# Altium PCB Для Сережи(autoroute.PcbDoc (part 2 of 2)
Units mm, origin at the board's own origin, x right, y up, seen from the top; angles counter-clockwise.
Board outline 53 x 45 mm, 4 copper layers (Top Layer, Layer 1, Layer 2, Bottom Layer), stack 1.083 mm thick; 122 components, 141 nets, 830 pads, 246 vias.
Unrouted connection lines stored in the file: 174.
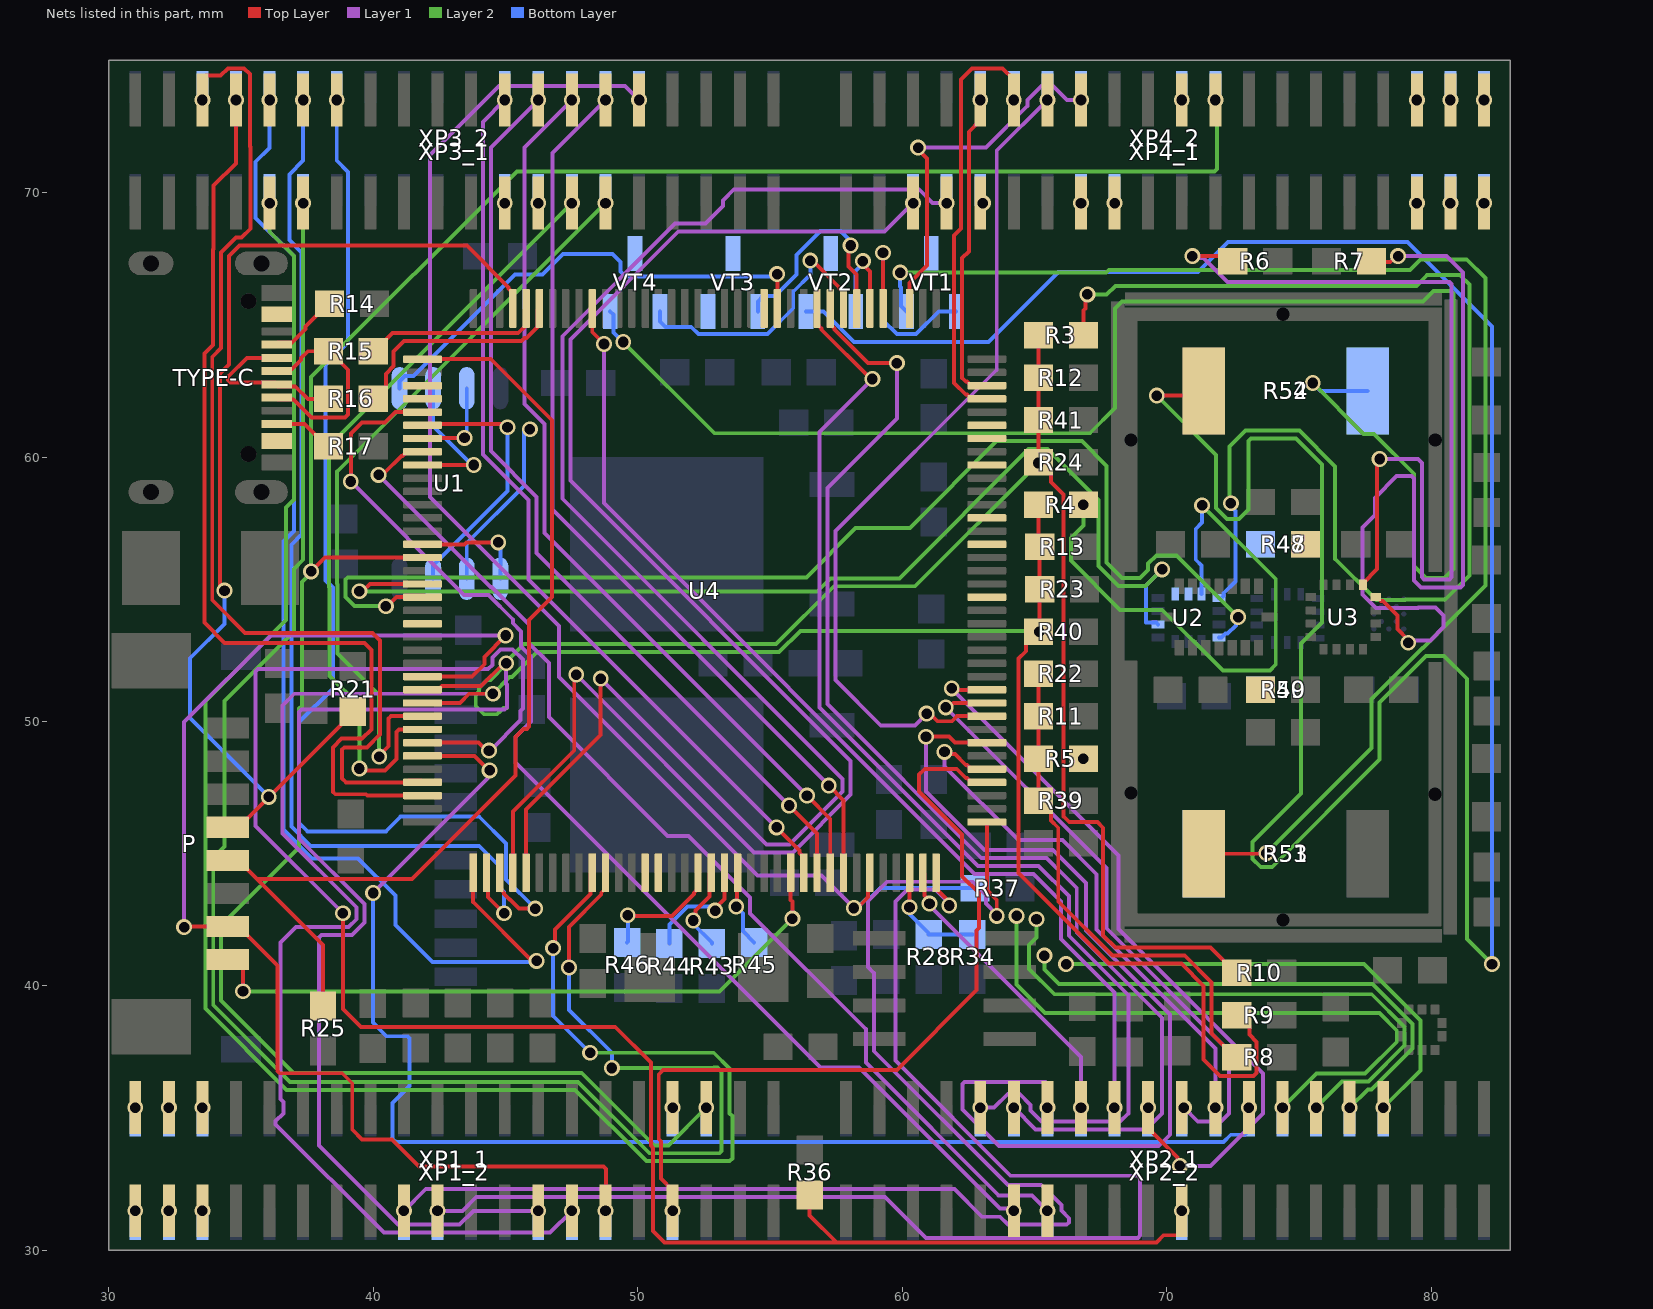
[diagram p4: the nets of this part, all layers, seen from the top]

## Via types
v1: diameter 0.6, hole 0.4, Top Layer to Bottom Layer, 246 vias

## Nets (pads, with @x,y where several pads share a name; then routed paths per layer and width w, separated by ;. In a path a pad name is that pad's centre, name@x,y a point inside that pad or via, vN(x,y) a via of type N, cw(c..) or ccw(c..) an arc to the next point about the centre after c; other vN are vias at no path point) (continued)
NetP_4: P.4 R21.1 U4.105 | length 41.7
  Top Layer w0.15: v1(34.375,54.95) 34.212,55.113 34.212,63.161 34.545,63.494 34.545,67.605 34.94,68 43.537,68 45.12,66.417 45.12,66.375 45.28,66.215 U4.105@45.28,65.62 ; P.4@34.5,46 34.9,46 38.925,50.025 39.175,50.025 39.6,50.45 R21.1@39.6,50.5
  Bottom Layer w0.15: v1(34.375,54.95) 34.375,53.693 33.075,52.393 33.075,50.125 v1(36.05,47.15)
NetP_5: P.5 R25.1 U4.109 | length 38.5
  Top Layer w0.15: P.5@34.5,44.75 34.9,44.75 35.6,44.05 ; R25.1@38.1,39.25 38.1,41.55 35.6,44.05 ; U4.109@41.86,63.7 44.442,63.7 46.75,61.392 46.75,54.701 45.892,53.843 45.892,49.813 45.805,49.725 45.683,49.725 45.375,49.417 45.375,47.958 41.467,44.05 35.6,44.05
NetP_7: P.7 R5.2 R8.1 R11.1 R22.1 R39.1 U4.133 XP1_1.29 XP1_2.29 | length 69.2
  Top Layer w0.15: v1(32.85,42.225) 32.875,42.25 P.7@34.5,42.25 34.9,42.25 36.371,40.779 36.371,36.788 36.459,36.7 38.828,36.7 39.205,36.323 39.205,34.577 39.582,34.2 40.7,34.2 41.725,33.175 48.712,33.175 48.8,33.087 48.8,31.52 v1(48.78,31.5) ; U4.133@41.86,51.7 43.733,51.7 44.198,52.166 44.198,52.447 v1(45.005,53.253) ; R22.1@65.15,51.8 R11.1@65.15,50.2 R5.2@65.15,48.6 R39.1@65.15,47 65.2,47 65.625,46.575 65.625,46.258 65.9,45.983 65.9,43.193 67.945,41.148 70.683,41.148 71.7,40.131 71.7,38.2 72.6,37.3 R8.1@72.65,37.3
  Layer 1 w0.15: v1(32.85,42.225) 32.85,49.975 36.128,53.253 v1(45.005,53.253)
NetP_8: P.8 U4.25 | length 25.3
  Top Layer w0.15: P.8@34.5,41 34.75,41 35.075,40.675 v1(35.075,39.8) ; U4.25@55.78,44.28 55.78,43.256 55.85,43.186 v1(55.85,42.55)
  Layer 2 w0.15: v1(35.075,39.8) 53.1,39.8 v1(55.85,42.55)
NetR3_1: R3.1 U2.1 | length 48.1
  Top Layer w0.15: R3.1@66.85,64.6 66.85,65.55 66.925,65.625 66.925,66.075 v1(67,66.15)
  Layer 2 w0.15: v1(67,66.15) 67.733,66.15 68.058,66.475 79.441,66.475 79.841,66.875 81.099,66.875 81.45,66.524 81.45,55.525 80.533,54.608 79.035,54.608 79.013,54.586 77.939,54.586 77.85,54.675 76.371,56.154 76.371,59.645 75.017,61 72.976,61 72.375,60.399 72.375,58.303 v1(72.427,58.252)
  Bottom Layer w0.15: U2.1@71.975,54.675 72.075,54.675 72.15,54.75 72.15,54.85 72.6,55.3 72.6,57.956 72.427,58.13 v1(72.427,58.252)
NetR3_2: R3.2 R10.1 R12.2 R24.2 R41.1 U4.134 XP1_1.25 XP1_2.25 | length 98.6
  Top Layer w0.15: U4.134@41.86,51.2 42.455,51.2 42.605,51.35 44.082,51.35 44.935,52.203 v1(45.028,52.203) ; R3.2@65.15,64.6 R12.2@65.15,63 R41.1@65.15,61.4 R24.2@65.15,59.8 65.2,59.8 65.625,59.375 65.625,59.058 66.1,58.583 66.1,46.417 66.317,46.2 67.383,46.2 67.6,45.983 67.6,41.917 68.069,41.448 71.652,41.448 72.6,40.5 R10.1@72.65,40.5
  Layer 1 w0.15: v1(45.028,52.203) 45.028,51.425 45.049,51.403 45.049,50.538 44.961,50.45 37.288,50.45 37.2,50.362 37.2,45.567 39.675,43.092 39.675,42.408 39.192,41.925 38.038,41.925 37.95,41.837 37.95,33.968 40.943,30.975 43.268,30.975 43.793,31.5 v1(46.24,31.5)
  Layer 2 w0.15: v1(45.028,52.203) 45.028,52.17 v1@45.025,52.167 ; 45.05,50.515 44.928,50.515 44.773,50.36 44.763,50.36 44.678,50.275 44.183,50.275 43.875,50.583 43.875,51.017 43.999,51.142 43.999,51.267 44.307,51.575 44.433,51.575 v1@45.025,52.167 ; v1(65.15,59.775) 60.49,55.115 57.414,55.115 55.224,52.925 45.7,52.925 45.025,52.25 v1@45.025,52.167
NetR4_1: R4.1 U2.14 | length 22.6
  Layer 2 w0.15: v1(66.85,58.2) 66.85,57.409 66.375,56.934 66.375,56.084 68.234,54.225 69.833,54.225 72.133,51.925 73.9,51.925 74.125,52.15 74.125,55.386 v1(71.34,58.171)
  Bottom Layer w0.15: U2.14@71.325,54.825 71.325,55.892 71.1,56.117 71.1,57.283 71.34,57.523 v1(71.34,58.171)
NetR4_2: R4.2 R9.1 R13.1 R23.1 R40.1 U4.135 XP1_1.27 XP1_2.27 | length 96
  Top Layer w0.15: U4.135@41.86,50.7 43.274,50.7 43.624,51.05 v1(44.524,51.05) ; R4.2@65.15,58.2 65.15,56.65 R13.1@65.2,56.6 R23.1@65.2,55 65.2,53.45 R40.1@65.15,53.4 65.1,53.4 64.675,52.975 64.675,52.658 64.4,52.383 64.4,44.269 67.821,40.848 70.559,40.848 71.4,40.007 71.4,37.217 72.017,36.6 73.283,36.6 73.4,36.717 73.4,37.883 73.125,38.158 73.125,38.475 72.7,38.9 R9.1@72.65,38.9
  Layer 1 w0.15: v1(44.524,51.05) 37.013,51.05 36.575,50.612 36.575,45.767 39.375,42.967 39.375,42.533 39.067,42.225 37.075,42.225 36.5,41.65 36.5,35.722 36.605,35.617 36.605,35.183 36.311,34.888 36.311,34.764 40.4,30.675 46.685,30.675 v1(47.51,31.5)
  Layer 2 w0.15: v1(44.524,51.05) 45.153,51.678 45.245,51.678 46.192,52.625 55.348,52.625 56.148,53.425 65.15,53.425 v1(65.175,53.4)
NetR5_1: R5.1 U2.13
  other v1: 66.85,48.6
NetR6_1: R6.1 U3.16 U4.10 XP3_1.9 XP3_2.9 | length 106.7
  Top Layer w0.15: v1(46.798,41.433) 46.877,41.513 46.877,42.134 48.215,43.472 48.215,44.215 U4.10@48.28,44.28 ; v1(70.975,67.6) 72.3,67.6 R6.1@72.5,67.4 ; U3.16@77.425,55.175 77.425,55.225 77.959,55.759 77.959,59.834 v1(78.05,59.925)
  Layer 1 w0.15: v1(70.975,67.6) 71.05,67.525 71.4,67.525 72.3,66.625 80.687,66.625 80.775,66.537 80.775,55.463 80.687,55.375 79.736,55.375 79.649,55.463 79.649,59.776 79.5,59.925 v1(78.05,59.925)
  Layer 2 w0.15: v1(36.08,69.6) 36.08,68.52 36.995,67.605 36.995,58.395 36.7,58.1 36.7,53.833 33.65,50.783 33.65,39.151 36.726,36.075 47.625,36.075 50.325,33.375 53.475,33.375 53.575,33.475 53.575,35.083 53.475,35.183 53.475,36.874 52.874,37.475 v1(48.2,37.475)
  Bottom Layer w0.15: v1@46.8,41.45 46.8,38.875 v1(48.2,37.475)
NetR7_1: R7.1 U3.1 U4.11 XP3_1.11 XP3_2.11 | length 104.1
  Top Layer w0.15: v1(47.4,40.7) 47.4,42.233 48.62,43.453 48.62,43.525 48.78,43.685 U4.11@48.78,44.28 ; R7.1@77.75,67.4 77.775,67.375 78.454,67.375 78.679,67.6 v1(78.75,67.6) ; U3.1@77.9,54.7 77.95,54.7 78.1,54.55 78.183,54.55 78.729,54.004 78.729,53.496 79.133,53.092 v1(79.133,52.976)
  Layer 1 w0.15: v1(78.75,67.6) 80.575,67.6 81.2,66.975 81.2,55.163 81.112,55.075 79.612,55.075 79.349,55.339 79.349,59.187 79.261,59.275 78.694,59.275 77.871,58.452 77.871,57.804 77.4,57.333 77.4,54.8 77.914,54.286 79.499,54.286 79.52,54.308 80.167,54.308 80.475,54 80.475,53.566 79.968,53.059 79.216,53.059 v1(79.133,52.976)
  Layer 2 w0.15: v1(37.35,69.6) 37.35,56.117 37,55.767 37,53.4 34.375,50.775 34.375,45.267 33.95,44.842 33.95,39.275 36.85,36.375 47.749,36.375 50.449,33.675 53.087,33.675 53.175,33.763 53.175,36.75 53.012,36.913 52.888,36.913 52.875,36.9 v1(49.025,36.9)
  Bottom Layer w0.15: v1(47.4,40.7) 47.4,39.1 49.025,37.475 v1(49.025,36.9)
NetR14_2: R14.2 TYPE-C.A5 | length 2.7
  Top Layer w0.15: TYPE-C.A5@36.35,64.25 36.425,64.325 36.928,64.325 37.439,64.836 37.439,64.939 38.3,65.8 R14.2@38.35,65.8
NetR15_1: R15.1 TYPE-C.A6 TYPE-C.B6 | length 8.1
  Top Layer w0.15: TYPE-C.B6@36.35,62.25 36.425,62.175 36.992,62.175 37.667,61.5 38.933,61.5 39.05,61.617 39.05,63.3 38.35,64 R15.1@38.3,64 37.525,64 37.264,63.739 37.264,63.661 36.928,63.325 36.425,63.325 TYPE-C.A6@36.35,63.25
NetR15_2: R15.2 U4.104 | length 6.8
  Top Layer w0.15: R15.2@40,64 40.05,64 40.735,64.685 45.482,64.685 45.715,64.918 45.715,65.555 U4.104@45.78,65.62
NetR16_1: R16.1 TYPE-C.A7 TYPE-C.B7 | length 6.3
  Top Layer w0.15: TYPE-C.B7@36.35,63.75 35.225,63.75 34.512,63.037 34.512,62.913 34.6,62.825 36.275,62.825 TYPE-C.A7@36.35,62.75 36.425,62.675 37.05,62.675 37.525,62.2 R16.1@38.3,62.2
NetR16_2: R16.2 U4.103 | length 8.7
  Top Layer w0.15: R16.2@40,62.2 40.05,62.2 40.475,62.625 40.475,63.142 40.769,63.436 40.769,63.994 41.16,64.385 45.607,64.385 45.722,64.5 45.797,64.5 46.215,64.918 46.215,65.555 U4.103@46.28,65.62
NetR17_1: R17.1 TYPE-C.B5 | length 2.3
  Top Layer w0.15: TYPE-C.B5@36.35,61.25 37.4,61.25 38.25,60.4 R17.1@38.3,60.4
NetR28_1: R28.1 R34.2 U4.34 | length 4.3
  Top Layer w0.15: v1(60.275,42.975) 60.277,42.977 60.277,44.278 U4.34@60.28,44.28
  Bottom Layer w0.15: v1(60.275,42.975) 60.275,42.725 61,42 R28.1@61,41.95 62.646,41.95 R34.2@62.65,41.953
NetR36_1: R36.1 U4.138 XP2_1.20 XP2_2.20 | length 73.8
  Top Layer w0.15: v1(38.85,42.75) 38.85,39.131 39.531,38.45 49.15,38.45 50.495,37.105 50.495,33.961 50.575,33.881 50.575,30.737 51.012,30.3 57.525,30.3 ; U4.138@41.86,49.2 43.983,49.2 44.283,48.9 v1(44.375,48.9) ; R36.1@56.5,32.1 56.5,31.325 57.525,30.3 ; v1(70.57,31.5) 70.57,30.725 70.42,30.575 69.883,30.575 69.608,30.3 57.525,30.3
  Layer 1 w0.15: v1(38.85,42.75) 35.555,46.045 35.555,51.892 35.642,51.98 44.338,51.98 44.503,52.144 44.503,52.421 44.81,52.728 45.273,52.728 45.663,52.339 45.663,50.484 45.575,50.396 45.575,50.05 44.425,48.9 v1(44.375,48.9)
NetR37_1: R37.1 U4.31 XP3_1.32 XP3_2.32 | length 52.3
  Top Layer w0.15: v1(58.175,42.95) 58.297,42.95 58.551,43.204 58.557,43.204 58.715,43.362 58.715,44.215 U4.31@58.78,44.28
  Layer 1 w0.15: v1(50.05,73.5) 49.525,74.025 44.753,74.025 42.15,71.422 42.15,58.484 47.029,53.605 47.029,51.679 54.533,44.175 56.95,44.175 v1(58.175,42.95)
  Bottom Layer w0.15: v1(58.175,42.95) 58.297,42.95 58.596,43.249 58.724,43.249 59.175,43.7 R37.1@62.75,43.7
NetR43_1: R43.1 R48.1 U4.19 | length 3.2
  Top Layer w0.15: v1(52.1,42.475) 52.186,42.561 52.186,42.854 52.715,43.382 52.715,44.215 U4.19@52.78,44.28
  Bottom Layer w0.15: v1@52.1,42.425 52.1,42.35 52.8,41.65 R43.1@52.8,41.6
NetR44_1: R44.1 R49.1 U4.20 | length 4.4
  Top Layer w0.15: v1(52.925,42.85) 52.925,42.942 53.273,43.291 53.273,44.273 U4.20@53.28,44.28
  Bottom Layer w0.15: R44.1@51.2,41.6 51.2,42.317 51.883,43 52.775,43 v1(52.925,42.85)
NetR45_1: R45.1 R50.1 U4.21 | length 2.9
  Top Layer w0.15: v1(53.725,43) 53.752,43.027 53.752,44.253 U4.21@53.78,44.28
  Bottom Layer w0.15: v1(53.725,43) 53.975,42.75 53.975,42.075 R45.1@54.4,41.65
NetR46_1: R46.1 R47.1 U4.18 | length 4.7
  Top Layer w0.15: v1@49.625,42.65 51.287,42.65 52.12,43.483 52.12,43.525 52.28,43.685 U4.18@52.28,44.28
  Bottom Layer w0.15: R46.1@49.6,41.65 49.625,41.675 v1(49.625,42.675)
NetR51_1: R51.1 VT1.2 | length 51.8
  Top Layer w0.15: R51.1@71.4,45 73.75,45 v1(73.775,45.025)
  Layer 2 w0.15: v1(59.925,66.975) 67.71,66.975 67.81,67.075 79.192,67.075 79.592,67.475 81.347,67.475 82.05,66.772 82.05,55.141 79.689,52.779 79.678,52.779 77.75,50.851 77.75,49 v1(73.775,45.025)
  Bottom Layer w0.15: v1(59.925,66.975) 59.925,66.446 59.956,66.415 59.956,65.712 VT1.2@60.16,65.508
NetR52_1: R52.1 VT2.2 | length 108.1
  Top Layer w0.15: v1(69.625,62.325) 71.225,62.325 R52.1@71.4,62.5
  Layer 2 w0.15: v1(69.625,62.325) 71.865,60.085 71.865,58.07 72.274,57.662 72.737,57.662 73.1,58.025 73.1,60.612 73.188,60.7 74.892,60.7 75.875,59.717 75.875,53.745 75.075,52.945 75.075,47.275 73.25,45.45 73.25,44.808 73.558,44.5 73.992,44.5 78.05,48.558 78.05,50.726 79.803,52.479 80.489,52.479 81.351,51.617 81.351,41.774 v1(82.3,40.825)
  Bottom Layer w0.15: VT2.2@56.36,65.508 57.017,65.508 58.178,64.347 63.255,64.347 65.908,67 71.192,67 72.317,68.125 79.108,68.125 82.3,64.933 v1(82.3,40.825)
NetR53_1: R53.1 VT3.2
NetR54_1: R54.1 VT4.2 | length 61.8
  Layer 2 w0.15: v1(49.45,64.35) 52.9,60.9 67.092,60.9 68.05,61.858 68.05,65.618 68.307,65.875 79.69,65.875 80.09,66.275 80.762,66.275 80.85,66.187 80.85,55.774 80.497,55.421 79.811,55.421 79.349,55.883 79.349,59.369 77.841,60.876 77.449,60.876 v1(75.525,62.8)
  Bottom Layer w0.15: VT4.2@48.96,65.508 49.083,65.385 49.083,64.717 v1(49.45,64.35) ; v1(75.525,62.8) 75.825,62.5 R54.1@77.6,62.5
NetTYPE-C_A4_B9: TYPE-C.A4_B9 TYPE-C.B4_A9
NetU1_1: U1.1 U4.123 | length 4.3
  Top Layer w0.15: U4.123@41.86,56.7 43.449,56.7 43.524,56.775 v1(44.725,56.775)
  Bottom Layer w0.15: v1(44.725,56.775) 44.805,56.695 U1.1@44.805,55.4
NetU1_2: U1.2 U4.86 | length 6.5
  Bottom Layer w0.15: U1.2@43.535,55.4 43.535,56.746 45.7,58.911 v1@45.7,61.05
  other v1: 45.925,61.05
NetU1_3: U1.3 U4.114 | length 10.2
  Top Layer w0.15: U4.114@41.86,61.2 41.91,61.25 44.828,61.25 44.953,61.125 v1(45.075,61.125)
  Bottom Layer w0.15: U1.3@42.265,55.4 42.265,55.9 45.075,58.71 v1(45.075,61.125)
NetU1_5: U1.5 U4.85 | length 18.4
  Top Layer w0.15: v1(55.273,66.919) 55.276,66.915 55.276,65.624 U4.85@55.28,65.62
  Bottom Layer w0.15: U1.5@40.995,62.6 40.995,62.854 41.203,63.062 41.52,63.062 45.358,66.9 46.408,66.9 47.183,67.675 49.042,67.675 49.35,67.367 49.35,67.02 49.538,66.832 55.185,66.832 v1(55.273,66.919)
NetU1_6: U1.6 U4.117 | length 5.5
  Top Layer w0.15: U4.117@41.86,59.7 v1(43.8,59.7)
  Bottom Layer w0.15: U1.6@42.265,62.6 42.265,61.168 43.733,59.7 v1(43.8,59.7)
NetU1_7: U1.7 U4.115 | length 3.5
  Top Layer w0.15: U4.115@41.86,60.7 41.873,60.713 43.438,60.713 v1(43.45,60.725)
  Bottom Layer w0.15: v1(43.45,60.725) 43.535,60.81 U1.7@43.535,62.6
NetU2_4: U2.4 U4.127 | length 46.7
  Top Layer w0.15: v1(40.475,54.36) 40.536,54.36 40.877,54.7 U4.127@41.86,54.7
  Layer 2 w0.15: v1(40.475,54.36) 39.298,54.36 38.95,54.708 38.95,55.362 39.038,55.45 56.375,55.45 58.242,57.317 59.352,57.317 60.289,57.318 63.571,60.6 66.792,60.6 67.725,59.667 67.725,56.007 68.311,55.421 68.997,55.421 69.3,55.724 69.3,55.967 69.608,56.275 70.375,56.275 v1(72.7,53.95)
  Bottom Layer w0.15: U2.4@71.975,53.175 72.075,53.175 72.225,53.325 72.308,53.325 72.614,53.631 72.614,53.864 v1(72.7,53.95)
NetU2_9: U2.9 U4.126 | length 41.7
  Top Layer w0.15: v1(39.475,54.925) 39.597,54.925 39.872,55.2 U4.126@41.86,55.2
  Layer 2 w0.15: v1(39.475,54.925) 56.8,54.925 57.29,55.415 59.897,55.415 64.782,60.3 65.492,60.3 67.425,58.367 67.425,55.883 68.187,55.121 69.196,55.121 v1(69.825,55.75)
  Bottom Layer w0.15: U2.9@69.675,53.675 69.612,53.738 69.225,53.738 69.225,55.15 v1(69.825,55.75)
NetU2_12: U2.12 U4.54
NetU4_1: U4.1 XP3_1.10 XP3_2.10 | length 45.3
  Top Layer w0.15: U4.1@43.78,44.28 43.78,43.178 46.008,40.95 v1(46.175,40.95)
  Bottom Layer w0.15: v1(36.08,73.5) 36.08,71.691 35.555,71.166 35.555,69.045 36.995,67.605 36.995,57.203 36.6,56.808 36.6,45.909 37.687,44.822 39.43,44.822 40.836,43.416 40.836,42.306 42.242,40.9 46.125,40.9 v1(46.175,40.95)
NetU4_2: U4.2 XP3_1.12 XP3_2.12 | length 40.2
  Top Layer w0.15: U4.2@44.28,44.28 44.345,44.215 44.345,43.355 v1(44.95,42.75)
  Bottom Layer w0.15: v1(37.35,73.5) 37.35,71.208 36.825,70.683 36.825,68.199 37.295,67.729 37.295,57.079 36.9,56.684 36.9,46.033 37.633,45.3 44.008,45.3 44.723,44.584 44.723,43.781 44.95,43.554 v1(44.95,42.75)
NetU4_3: U4.3 XP3_1.14 XP3_2.14 | length 42.3
  Top Layer w0.15: U4.3@44.78,44.28 44.78,43.685 44.94,43.525 44.94,43.483 45.148,43.275 45.167,43.275 45.517,42.925 v1(46.125,42.925)
  Bottom Layer w0.15: v1(38.62,73.5) 38.62,71.208 39.045,70.783 39.045,64.323 38.2,63.478 38.2,55.335 38.471,55.064 38.471,51.246 37.2,49.975 37.2,46.158 37.508,45.85 40.483,45.85 41.033,46.4 44.008,46.4 45.023,45.384 45.023,44.027 v1(46.125,42.925)
NetU4_4: U4.4 XP4_1.5 XP4_2.5 | length 59.2
  Top Layer w0.15: U4.4@45.28,44.28 45.28,46.591 47.6,48.91 47.6,51.7 v1(47.675,51.775)
  Layer 1 w0.15: v1(47.675,51.775) 54.4,45.05 55.867,45.05 58.05,47.233 58.05,48.507 47.451,59.106 47.451,64.444 51.533,68.525 59.335,68.525 v1(60.41,69.6)
NetU4_5: U4.5 XP4_1.7 XP4_2.7 | length 59.9
  Top Layer w0.15: U4.5@45.78,44.28 45.78,46.666 48.6,49.486 v1(48.6,51.625)
  Layer 1 w0.15: v1(48.6,51.625) 54.875,45.35 55.742,45.35 57.75,47.358 57.75,47.825 47.151,58.424 47.151,64.568 51.408,68.825 52.557,68.825 53.225,69.493 53.225,69.707 53.643,70.125 60.627,70.125 61.152,69.6 v1(61.68,69.6)
NetU4_14: U4.14 XP4_1.15 XP4_2.15
  other v1: 66.76,69.6
NetU4_15: U4.15 XP4_1.17 XP4_2.17
  other v1: 68.03,69.6
NetU4_26: U4.26 XP3_1.24 XP3_2.24 | length 34.6
  Top Layer w0.15: v1(55.254,45.996) 56.12,45.13 56.12,45.035 56.28,44.875 U4.26@56.28,44.28
  Layer 1 w0.15: v1(44.97,73.5) 44.145,72.675 44.145,60.097 45.875,58.367 45.875,55.375 v1(55.254,45.996)
NetU4_27: U4.27 XP3_1.26 XP3_2.26 | length 35.1
  Top Layer w0.15: v1(55.725,46.825) 56.78,45.77 U4.27@56.78,44.28
  Layer 1 w0.15: v1(46.24,73.5) 44.445,71.705 44.445,60.222 46.175,58.492 46.175,56.375 v1(55.725,46.825)
NetU4_28: U4.28 XP3_1.28 XP3_2.28 | length 34.8
  Top Layer w0.15: v1(56.4,47.2) 57.28,46.32 U4.28@57.28,44.28
  Layer 1 w0.15: v1(47.51,73.5) 45.715,71.705 45.715,62.002 46.475,61.242 46.475,57.125 v1(56.4,47.2)
NetU4_29: U4.29 XP3_1.30 XP3_2.30 | length 34.6
  Top Layer w0.15: v1(57.225,47.575) 57.78,47.02 U4.29@57.78,44.28
  Layer 1 w0.15: v1(48.78,73.5) 46.775,71.495 46.775,58.025 v1(57.225,47.575)
NetU4_35: U4.35 XP2_1.25 XP2_2.25 | length 11.4
  Top Layer w0.15: U4.35@60.78,44.28 60.845,44.215 60.845,43.425 61.032,43.238 v1(61.032,43.117)
  Layer 1 w0.15: v1(61.032,43.117) 61.032,43.046 66.76,37.318 v1(66.76,35.4)
NetU4_36: U4.36 XP1_1.19 XP1_2.19 | length 50.7
  Top Layer w0.15: U4.36@61.28,44.28 61.28,43.685 61.692,43.273 61.692,43.128 v1(61.778,43.042)
  Layer 1 w0.15: v1(42.43,31.5) 43.369,31.5 43.894,32.025 59.357,32.025 60.907,30.475 68.912,30.475 69,30.563 69,32.737 68.912,32.825 64.1,32.825 59.75,37.175 59.75,43.192 60.199,43.642 61.249,43.642 61.778,43.113 v1(61.778,43.042)
NetU4_37: U4.37 XP1_1.17 XP1_2.17 | length 51.8
  Top Layer w0.15: U4.37@63.2,46.2 63.2,43.625 63.575,43.25 v1@63.575,42.651
  Layer 1 w0.15: v1(41.16,31.5) 41.985,32.325 61.975,32.325 63.025,31.275 63.703,31.275 64.003,30.975 66.212,30.975 66.3,31.063 66.3,31.218 66.015,31.503 66.015,31.717 65.257,32.475 64,32.475 58.925,37.55 58.925,40.496 58.7,40.721 58.7,43.217 59.424,43.942 62.659,43.942 63.167,43.434 63.167,43.116 63.575,42.708 v1(63.575,42.65)
NetU4_40: U4.40 XP1_1.33 XP1_2.33 | length 30.7
  Top Layer w0.15: v1(51.32,31.5) 51.32,32.275 50.875,32.72 50.875,34.129 50.795,34.209 50.795,36.657 50.963,36.825 59.8,36.825 62.816,39.841 62.816,42.097 62.903,42.185 62.903,43.508 62.9,43.512 62.265,44.147 62.265,45.732 60.643,47.355 60.643,47.993 60.863,48.213 62.049,48.213 62.403,47.86 62.445,47.86 62.605,47.7 U4.40@63.2,47.7
NetU4_41: U4.41 XP2_1.17 XP2_2.17 | length 20.5
  Top Layer w0.15: v1(61.6,48.85) 61.686,48.764 61.999,48.764 62.403,48.36 62.445,48.36 62.605,48.2 U4.41@63.2,48.2
  Layer 1 w0.15: v1(61.6,48.85) 61.6,48.308 64.391,45.516 66.059,45.516 67.35,44.225 67.35,42.133 71.84,37.643 v1(71.84,35.4)
NetU4_43: U4.43 XP2_1.27 XP2_2.27 | length 36.5
  Top Layer w0.15: v1(60.9,49.425) 61.767,49.425 61.992,49.2 U4.43@63.2,49.2
  Layer 1 w0.15: v1(60.9,49.425) 60.9,47.355 63.113,45.142 65.708,45.142 66.95,43.9 66.95,42.098 70.125,38.923 70.125,34.375 69.7,33.95 63.658,33.95 62.275,35.333 62.275,36.287 62.363,36.375 65.412,36.375 65.5,36.287 65.5,35.41 v1(65.49,35.4)
NetU4_45: U4.45 XP4_1.14 XP4_2.14 | length 32.1
  Top Layer w0.15: v1(60.925,50.3) 61.047,50.3 61.336,50.01 61.89,50.01 62.08,50.2 U4.45@63.2,50.2
  Layer 1 w0.15: v1(60.925,50.3) 60.482,49.857 59.189,49.857 57.475,51.571 57.475,57.2 63.575,63.3 63.575,71.585 v1(65.49,73.5)
NetU4_46: U4.46 XP2_1.19 XP2_2.19 | length 23.5
  Top Layer w0.15: v1(61.648,50.535) 61.769,50.535 61.934,50.7 U4.46@63.2,50.7
  Layer 1 w0.15: v1(61.648,50.535) 67.725,44.458 67.725,42.183 72.365,37.543 72.365,35.183 72.057,34.875 71.175,34.875 v1(70.65,35.4)
NetU4_47: U4.47 XP2_1.21 XP2_2.21 | length 28.9
  Top Layer w0.15: v1(61.875,51.25) 61.925,51.2 U4.47@63.2,51.2 ; v1(69.3,35.4) 69.3,34.625 70.414,33.511 70.414,33.286 v1(70.5,33.2)
  Layer 1 w0.15: v1(61.875,51.25) 61.875,51.233 68.175,44.933 68.175,42.157 73.635,36.697 73.635,35.183 71.652,33.2 v1(70.5,33.2)
NetU4_58: U4.58 XP4_1.9 XP4_2.9
  other v1: 63.05,69.6
NetU4_60: U4.60 XP2_1.7 XP2_2.7 | length 18.2
  Layer 2 w0.15: v1(66.2,40.825) 77.465,40.825 79.6,38.69 79.6,36.81 v1(78.19,35.4)
NetU4_64: U4.64 XP2_1.9 XP2_2.9 | length 19.5
  Layer 2 w0.15: v1(65.375,41.15) 65.375,40.625 65.923,40.077 77.789,40.077 79.3,38.566 79.3,37.634 77.75,36.084 77.604,36.084 v1(76.92,35.4)
NetU4_66: U4.66 XP2_1.11 XP2_2.11 | length 22.1
  Layer 2 w0.15: v1(65.079,42.521) 65.079,41.829 64.8,41.55 64.8,40.649 65.762,39.687 77.755,39.687 79,38.442 79,37.758 77.626,36.384 76.634,36.384 v1(75.65,35.4)
NetU4_67: U4.67 XP2_1.13 XP2_2.13 | length 23.5
  Layer 2 w0.15: v1(64.325,42.65) 64.325,40.051 65.401,38.975 78.042,38.975 78.7,38.317 78.7,37.883 77.502,36.684 75.664,36.684 v1(74.38,35.4)
NetU4_69: U4.69 XP4_1.12 XP4_2.12 | length 16.2
  Top Layer w0.15: U4.69@63.2,62.2 62.605,62.2 62.445,62.36 62.403,62.36 61.965,62.798 61.965,68.377 62.225,68.637 62.225,74.283 62.642,74.7 63.795,74.7 64.22,74.275 v1(64.22,73.5)
NetU4_70: U4.70 XP4_1.10 XP4_2.10 | length 11.8
  Top Layer w0.15: v1(62.95,73.5) 62.95,72.725 62.525,72.3 62.525,67.779 62.265,67.519 62.265,62.998 62.403,62.86 62.445,62.86 62.605,62.7 U4.70@63.2,62.7
NetU4_75: U4.75 XP4_1.16 XP4_2.16 | length 14
  Top Layer w0.15: U4.75@60.28,65.62 60.28,66.588 60.935,67.243 60.935,71.293 60.6,71.628 v1(60.6,71.7)
  Layer 1 w0.15: v1(60.6,71.7) 63.162,71.7 64.745,73.283 64.745,73.497 65.273,74.025 65.707,74.025 66.232,73.5 v1(66.76,73.5)
NetU4_77: U4.77 VT1.1 | length 8
  Top Layer w0.15: v1(59.275,67.725) 59.277,67.723 59.277,65.622 U4.77@59.28,65.62
  Bottom Layer w0.15: v1(59.275,67.725) 59.275,65.17 59.798,64.647 60.522,64.647 61.383,65.508 VT1.1@62.04,65.508
NetU4_78: U4.78 VT2.1 | length 3.9
  Top Layer w0.15: v1(58.514,67.411) 58.514,67.289 58.78,67.023 U4.78@58.78,65.62
  Bottom Layer w0.15: VT2.1@58.24,65.508 58.24,67.043 58.514,67.317 v1(58.514,67.411)
NetU4_79: U4.79 VT3.1 | length 8.3
  Top Layer w0.15: v1(58.05,68) 57.975,67.925 57.975,67.208 58.28,66.903 U4.79@58.28,65.62
  Bottom Layer w0.15: VT3.1@54.54,65.508 54.54,65.889 54.744,66.093 55.189,66.093 56,66.904 56,67.642 56.91,68.553 57.662,68.553 57.964,68.251 57.964,68.086 v1(58.05,68)
NetU4_80: U4.80 VT4.1 | length 10.5
  Top Layer w0.15: v1(56.525,67.425) 56.612,67.425 57.62,66.417 57.62,66.375 57.78,66.215 U4.80@57.78,65.62
  Bottom Layer w0.15: VT4.1@50.84,65.508 50.84,65.127 51.044,64.922 52.023,64.922 52.298,64.647 54.902,64.647 55.881,65.626 55.881,66.251 56.525,66.895 v1(56.525,67.425)
NetU4_81: U4.81 XP2_1.29 XP2_2.29 | length 46.1
  Top Layer w0.15: U4.81@57.28,65.62 57.28,65.025 57.44,64.865 57.44,64.823 58.713,63.55 v1(59.8,63.55)
  Layer 1 w0.15: v1(59.8,63.55) 59.8,61.455 57.175,58.83 57.175,50.655 62.989,44.842 65.458,44.842 66.6,43.7 66.6,42.024 69.825,38.799 69.825,35.183 69.217,34.575 65.045,34.575 v1(64.22,35.4)
NetU4_82: U4.82 XP2_1.31 XP2_2.31 | length 44.9
  Top Layer w0.15: U4.82@56.78,65.62 56.78,65.025 56.94,64.865 56.94,64.823 58.813,62.95 v1(58.875,62.95)
  Layer 1 w0.15: v1(58.875,62.95) 56.875,60.95 56.875,50.531 62.864,44.542 65.158,44.542 66.3,43.4 66.3,41.899 68.548,39.651 68.548,35.183 68.24,34.875 65.273,34.875 64.855,35.293 64.855,35.507 64.437,35.925 64.003,35.925 63.478,35.4 v1(62.95,35.4)
NetU4_99: U4.99 XP2_1.23 XP2_2.23 | length 39.7
  Top Layer w0.15: U4.99@48.28,65.62 48.28,64.72 v1(48.725,64.275)
  Layer 1 w0.15: v1(48.725,64.275) 48.725,58.257 62.74,44.242 64.958,44.242 66,43.2 66,41.775 68.023,39.752 v1(68.023,35.4)
NetU4_111: U4.111 XP3_1.23 XP3_2.23
  other v1: 44.97,69.6
NetU4_112: U4.112 XP3_1.25 XP3_2.25
  other v1: 46.24,69.6
NetU4_113: U4.113 XP2_1.30 XP2_2.30 | length 44.9
  Top Layer w0.15: v1(39.15,59.075) 39.15,60.883 39.576,61.309 40.442,61.309 40.833,61.7 U4.113@41.86,61.7
  Layer 1 w0.15: v1(39.15,59.075) 43.436,54.789 44.354,54.789 45.275,53.867 45.275,53.725 45.592,53.408 45.592,52.833 45.963,52.463 45.963,50.005 45.375,49.417 45.375,48.458 56.911,36.922 58.361,36.922 63.696,31.586 64.134,31.586 v1(64.22,31.5)
NetU4_116: U4.116 XP2_1.28 XP2_2.28 | length 41.5
  Top Layer w0.15: v1(40.2,59.325) 40.286,59.411 40.434,59.411 41.063,60.04 41.105,60.04 41.265,60.2 U4.116@41.86,60.2
  Layer 1 w0.15: v1@40.2,59.3 40.225,59.3 44.436,55.089 44.478,55.089 45.892,53.674 45.892,52.958 46.638,52.212 46.638,50.162 51.125,45.675 51.925,45.675 54.25,43.35 54.25,42.74 58.625,38.365 58.625,37.1 63.65,32.075 64.915,32.075 v1(65.49,31.5)
NetU4_124: U4.124 XP1_1.36 XP1_2.36 XP4_1.24 XP4_2.24 | length 90.7
  Top Layer w0.15: v1(37.65,55.675) 38.175,56.2 U4.124@41.86,56.2
  Layer 2 w0.15: v1(52.59,35.4) 51.165,33.975 50.625,33.975 47.884,36.716 36.992,36.716 34.25,39.458 34.25,42.283 37.2,45.233 37.2,50.487 37.3,50.588 37.3,55.283 37.65,55.633 v1(37.65,55.675) 37.65,63.022 45.428,70.8 71.812,70.8 71.9,70.888 71.9,73.44 v1(71.84,73.5)
NetU4_129: U4.129 XP1_1.34 XP1_2.34 XP4_1.22 XP4_2.22
  other v1: 51.32,35.4 70.57,73.5
NetU4_136: U4.136 XP3_1.29 XP3_2.29 | length 28.7
  Top Layer w0.15: v1(40.225,48.675) 40.225,48.712 40.578,49.065 40.578,50.112 40.666,50.2 U4.136@41.86,50.2
  Layer 2 w0.15: v1(40.225,48.675) 40.225,51 38.65,52.575 38.65,55.188 38.625,55.213 38.625,59.445 v1(48.78,69.6)
NetU4_137: U4.137 XP3_1.27 XP3_2.27 | length 29.3
  Top Layer w0.15: v1(39.475,48.225) 39.55,48.15 40.442,48.15 40.878,48.585 40.878,49.612 40.966,49.7 U4.137@41.86,49.7
  Layer 2 w0.15: v1(39.475,48.225) 39.475,50.6 38.35,51.725 38.35,55.064 38.325,55.089 38.325,60.415 v1(47.51,69.6)
NetU4_139: U4.139 XP2_1.15 XP2_2.15 | length 53.3
  Top Layer w0.15: U4.139@41.86,48.7 43.832,48.7 44.382,48.15 v1(44.4,48.15)
  Layer 1 w0.15: v1(39.992,43.517) 44.314,47.839 44.314,48.064 v1(44.4,48.15)
  Bottom Layer w0.15: v1(39.992,43.517) 39.992,38.616 40.508,38.1 41.287,38.1 41.375,38.012 41.375,36.223 40.735,35.583 40.735,34.217 40.852,34.1 72.148,34.1 72.423,34.375 72.96,34.375 73.11,34.525 v1(73.11,35.4)
NetU4_141: U4.141 XP3_1.6 XP3_2.6 | length 39.9
  Top Layer w0.15: v1(33.54,73.5) 33.54,74.275 33.69,74.425 34.227,74.425 34.502,74.7 35.118,74.7 35.335,74.483 35.335,71.74 35.35,71.725 35.35,68.632 35.018,68.3 34.816,68.3 34.245,67.729 34.245,64.119 33.912,63.786 33.912,54.588 35.15,53.35 39.97,53.35 40.25,53.07 40.25,49.518 39.757,49.025 38.913,49.025 38.825,48.937 38.825,47.853 38.978,47.7 41.306,47.7 41.371,47.765 41.795,47.765 U4.141@41.86,47.7
NetU4_142: U4.142 XP3_1.8 XP3_2.8 | length 36.9
  Top Layer w0.15: v1(34.81,73.5) 34.81,71.108 33.965,70.263 33.965,67.873 33.945,67.853 33.945,64.244 33.612,63.911 33.612,53.743 34.384,52.971 39.661,52.971 39.925,52.708 39.925,49.705 39.57,49.35 38.8,49.35 38.475,49.025 38.475,47.338 38.563,47.25 39.733,47.25 39.783,47.2 U4.142@41.86,47.2
VCC: VT1.3 VT2.3 VT3.3 VT4.3 XP1_1.1 XP1_1.2 XP1_1.3 XP1_1.4 XP1_1.5 XP1_1.6 XP1_2.1 XP1_2.2 XP1_2.3 XP1_2.4 XP1_2.5 XP1_2.6 XP4_1.35 XP4_1.36 XP4_1.37 XP4_1.38 XP4_1.39 XP4_1.40 XP4_2.35 XP4_2.36 XP4_2.37 XP4_2.38 XP4_2.39 XP4_2.40
  other v1: 31,31.5 32.27,31.5 33.54,31.5 31,35.4 32.27,35.4 33.54,35.4 79.46,69.6 80.73,69.6 82,69.6 79.46,73.5 80.73,73.5 82,73.5
pads on no net: D3.D4 D4.2 D4.3 D4.10 D4.11 D.9 D.CD P.S TYPE-C. TYPE-C.A8 TYPE-C.B8 TYPE-C.S1 TYPE-C.S2 TYPE-C.S3 TYPE-C.S4 U2.2 U2.3 U2.10 U2.11 U3.3 U3.5 U3.6 U3.7 U3.14 U3.15 U4.7 U4.12 U4.13 U4.44 U4.56 U4.57 U4.59 U4.63 U4.65 U4.68 U4.71 U4.76 U4.87 U4.96 U4.97 U4.102 U4.106 U4.118 U4.119 U4.122 U4.128 U4.140 U4.143 VD1.1 VD1.2 XP1_1.15 XP1_1.16 XP1_1.18 XP1_1.20 XP1_1.21 XP1_1.22 XP1_1.23 XP1_1.24 XP1_1.26 XP1_1.28 XP1_1.30 XP1_1.32 XP1_1.35 XP1_2.15 XP1_2.16 XP1_2.18 XP1_2.20 XP1_2.21 XP1_2.22 XP1_2.23 XP1_2.24 XP1_2.26 XP1_2.28 XP1_2.30 XP1_2.32 XP1_2.35 XP2_1.8 XP2_1.10 XP2_1.12 XP2_1.14 XP2_1.16 XP2_1.18 XP2_1.22 XP2_1.32 XP2_1.33 XP2_1.34 XP2_1.35 XP2_1.36 XP2_2.8 XP2_2.10 XP2_2.12 XP2_2.14 XP2_2.16 XP2_2.18 XP2_2.22 XP2_2.32 XP2_2.33 XP2_2.34 XP2_2.35 XP2_2.36 XP3_1.5 XP3_1.7 XP3_1.13 XP3_1.15 XP3_1.16 XP3_1.17 XP3_1.18 XP3_1.19 XP3_1.20 XP3_1.21 XP3_1.22 XP3_1.31 XP3_1.33 XP3_1.34 XP3_2.5 XP3_2.7 XP3_2.13 XP3_2.15 XP3_2.16 XP3_2.17 XP3_2.18 XP3_2.19 XP3_2.20 XP3_2.21 XP3_2.22 XP3_2.31 XP3_2.33 XP3_2.34 XP4_1.6 XP4_1.8 XP4_1.11 XP4_1.13 XP4_1.18 XP4_1.19 XP4_1.20 XP4_1.21 XP4_1.23 XP4_1.25 XP4_1.26 XP4_2.6 XP4_2.8 XP4_2.11 XP4_2.13 XP4_2.18 XP4_2.19 XP4_2.20 XP4_2.21 XP4_2.23 XP4_2.25 XP4_2.26

## Polygon pours and split planes (outlines as drawn)
3V3 on Top Layer "NONET_L-01_P-001" (solid, remove dead copper, pour order 27): 33.425,49.275 35.65,49.275 35.65,50.875 36.15,51.375 40.25,51.375 40.25,52.883 40.033,53.1 33.375,53.1
GND on Top Layer "NONET_L-01_P-001" (solid, remove dead copper, pour order 6): 53.225,36.85 53.225,30.9 59.85,30.9 59.85,36.85
3V3_SEN on Top Layer "NONET_L-01_P-001" (solid, remove dead copper, pour order 28): 75.925,55.175 76.825,55.175 77.475,55.825 77.975,55.825 77.975,58.325 77.95,58.3 76.35,58.3 76.35,56.25 75.625,55.525 75.625,55.05
3V3_SEN on Top Layer "NONET_L-01_P-001" (solid, remove dead copper, pour order 11): 75.625,55.525 76.2,55.525 76.225,55.55 76.225,54.425 78.275,54.425 78.3,54.4 78.25,54.35 78.25,52.975 77.1,52.975 75.625,54.45
3V3 on Top Layer "NONET_L-01_P-001" (solid, remove dead copper, pour order 26): 39.4,38.4 39.339,38.339 39.339,36.943 47.368,36.943 47.475,37.05 47.475,38.4
4V2 on Top Layer "NONET_L-01_P-001" (solid, remove dead copper, pour order 19): 73.725,74.65 73.725,68.35 73.8,68.275 76.15,68.275 76.15,74.625 76.075,74.7
3V3 on Top Layer "NONET_L-01_P-001" (solid, remove dead copper, pour order 18): 76.3,74.675 76.325,74.65 76.325,68.4 77.475,68.4 77.5,68.375 77.5,74.608
5V on Top Layer "NONET_L-01_P-001" (solid, remove dead copper, pour order 17): 77.5,74.7 77.5,68.375 77.575,68.3 78.65,68.3 78.65,74.65
VCC on Top Layer "NONET_L-01_P-001" (solid, remove dead copper, pour order 16): 78.85,74.625 78.9,74.575 78.9,68.3 82.7,68.3 82.775,68.375 82.775,74.625
3V3_SEN on Top Layer "NONET_L-01_P-001" (solid, remove dead copper, pour order 12): 77.725,53.35 77.75,53.325 78.525,53.325 78.525,49.925 77.7,49.1 74.725,49.1 74.725,50.075 74.7,50.1 75.05,50.45 77.9,50.45 77.9,51.825 77.725,52
3V3 on Top Layer "NONET_L-01_P-001" (solid, remove dead copper, pour order 10): 82.825,58.75 82.825,57.025 81.375,57.025 81.35,57 81.4,56.95 81.4,53.1 82.625,53.1 82.8,52.925 82.8,51.1 81.675,51.1 81.5,50.925 81.5,43.675 82.875,43.675 82.975,43.575 82.975,41.575 81.05,41.575 81.025,41.6 81.025,58.75
3V3_SEN on Top Layer "NONET_L-01_P-001" (solid, remove dead copper, pour order 9): 76.55,41.35 76.6,41.3 76.6,40.1 78.875,40.1 78.95,40.175 78.95,41.325
3V3_SEN on Top Layer "NONET_L-01_P-001" (solid, remove dead copper, pour order 8): 81.75,38.375 81.75,36.875 75.975,36.875 75.75,37.1 75.75,37.95 75.9,37.95 76.15,38.2 77.6,38.2 77.6,37.3 77.575,37.275 79.9,37.275 79.9,37.975 80.3,38.375
5V on Top Layer "NONET_L-01_P-001" (solid, remove dead copper, pour order 7): 56.125,37.125 57.95,37.125 57.975,37.1 58.025,37.15 58.025,38.625 60,38.625 60.65,39.275 60.65,39.925 57.925,39.925 57.9,39.95 56.475,38.525 56.15,38.525
GND on Top Layer "NONET_L-01_P-001" (solid, remove dead copper, pour order 5): 79,36.525 79,30.2 82.65,30.2 82.65,36.5
4V2 on Top Layer "NONET_L-01_P-001" (solid, remove dead copper, pour order 4): 36.8,36.425 36.85,36.375 36.85,30.225 39.3,30.225 39.225,30.3 39.225,36.525
3V3 on Top Layer "NONET_L-01_P-001" (solid, remove dead copper, pour order 3): 35.7,36.5 35.7,30.175 36.575,30.175 36.575,36.413 36.488,36.5
5V on Top Layer "NONET_L-01_P-001" (solid, remove dead copper, pour order 2): 34.4,36.55 34.375,36.525 34.375,30.15 35.4,30.15 35.425,30.125 35.5,30.2 35.5,36.55
VCC on Top Layer "NONET_L-01_P-001" (solid, remove dead copper, pour order 1): 30.325,36.55 30.325,30.175 34.15,30.175 34.15,36.525
GND on Top Layer "NONET_L-01_P-001" (solid, remove dead copper, pour order 0): 30.5,74.825 30.475,74.8 30.475,68.2 33,68.2 32.95,68.25 32.95,74.85
3V3_SEN on Bottom Layer "NONET_L-01_P-001" (solid, remove dead copper, pour order 25): 56.075,46.075 56.075,43.9 56.975,43 57.775,43 58.875,44.1 58.3,44.675 58.3,46.075
3V3_SEN on Bottom Layer "NONET_L-01_P-001" (solid, remove dead copper, pour order 13): 76.325,48.85 76.3,48.825 74.275,48.825 74.275,50.325 74.25,50.35 72.6,50.35 72.6,48.3 72.575,48.275 77.925,48.275 77.925,53.375 78.05,53.5 77.775,53.775 77.75,53.775 76.325,52.35
5V on Bottom Layer "NONET_L-01_P-001" (solid, remove dead copper, pour order 24): 58.675,50.925 56.1,50.925 55.225,51.8 55.225,52.95 53.6,52.95 53.55,52.9 53.55,51.25 54.65,51.25 55.15,50.75 55.15,49.175 58.7,49.175
3V3 on Bottom Layer "NONET_L-01_P-001" (solid, remove dead copper, pour order 23): 55.6,51.4 57.1,51.4 57.1,52.925 57.825,53.65 61.95,53.65 61.95,55.175 61.825,55.3 61.6,55.075 55.625,55.075
3V3 on Bottom Layer "NONET_L-01_P-001" (solid, remove dead copper, pour order 22): 58.425,48.5 58.425,46.95 62.075,46.95 62.1,46.925 62.1,44.55 63.525,44.55 63.55,44.525 63.575,44.55 63.575,47.25 62.95,47.25 61.7,48.5
3V3 on Bottom Layer "NONET_L-01_P-001" (solid, remove dead copper, pour order 21): 58.65,40.95 58.65,38.65 58.675,38.625 61.725,38.625 61.725,40.925
3V3 on Bottom Layer "NONET_L-01_P-001" (solid, remove dead copper, pour order 20): 48.8,40.65 48.8,39.025 55.425,39.025 55.45,39.05 55.45,40.625
3V3_SEN on Bottom Layer "NONET_L-01_P-001" (solid, remove dead copper, pour order 14): 74.475,59.075 74.5,59.05 74.5,57.375 76.375,57.375 76.45,57.3 76.45,56 78,56 78,59.05

## Text inside footprints (layer, text, board x,y; h text height)
TYPE-C: Mechanical 13 "PCB EDGE" at 29.7,57.8 h0.61 r270